# Altium PCB Sinalização_Official.PcbDoc
Units mm, origin at the board's own origin, x right, y up, seen from the top; angles counter-clockwise.
Board outline 65.15 x 100.2 mm, 2 copper layers (Top Layer, Bottom Layer), stack 1.671 mm thick; 27 components, 27 nets, 121 pads, 15 vias.
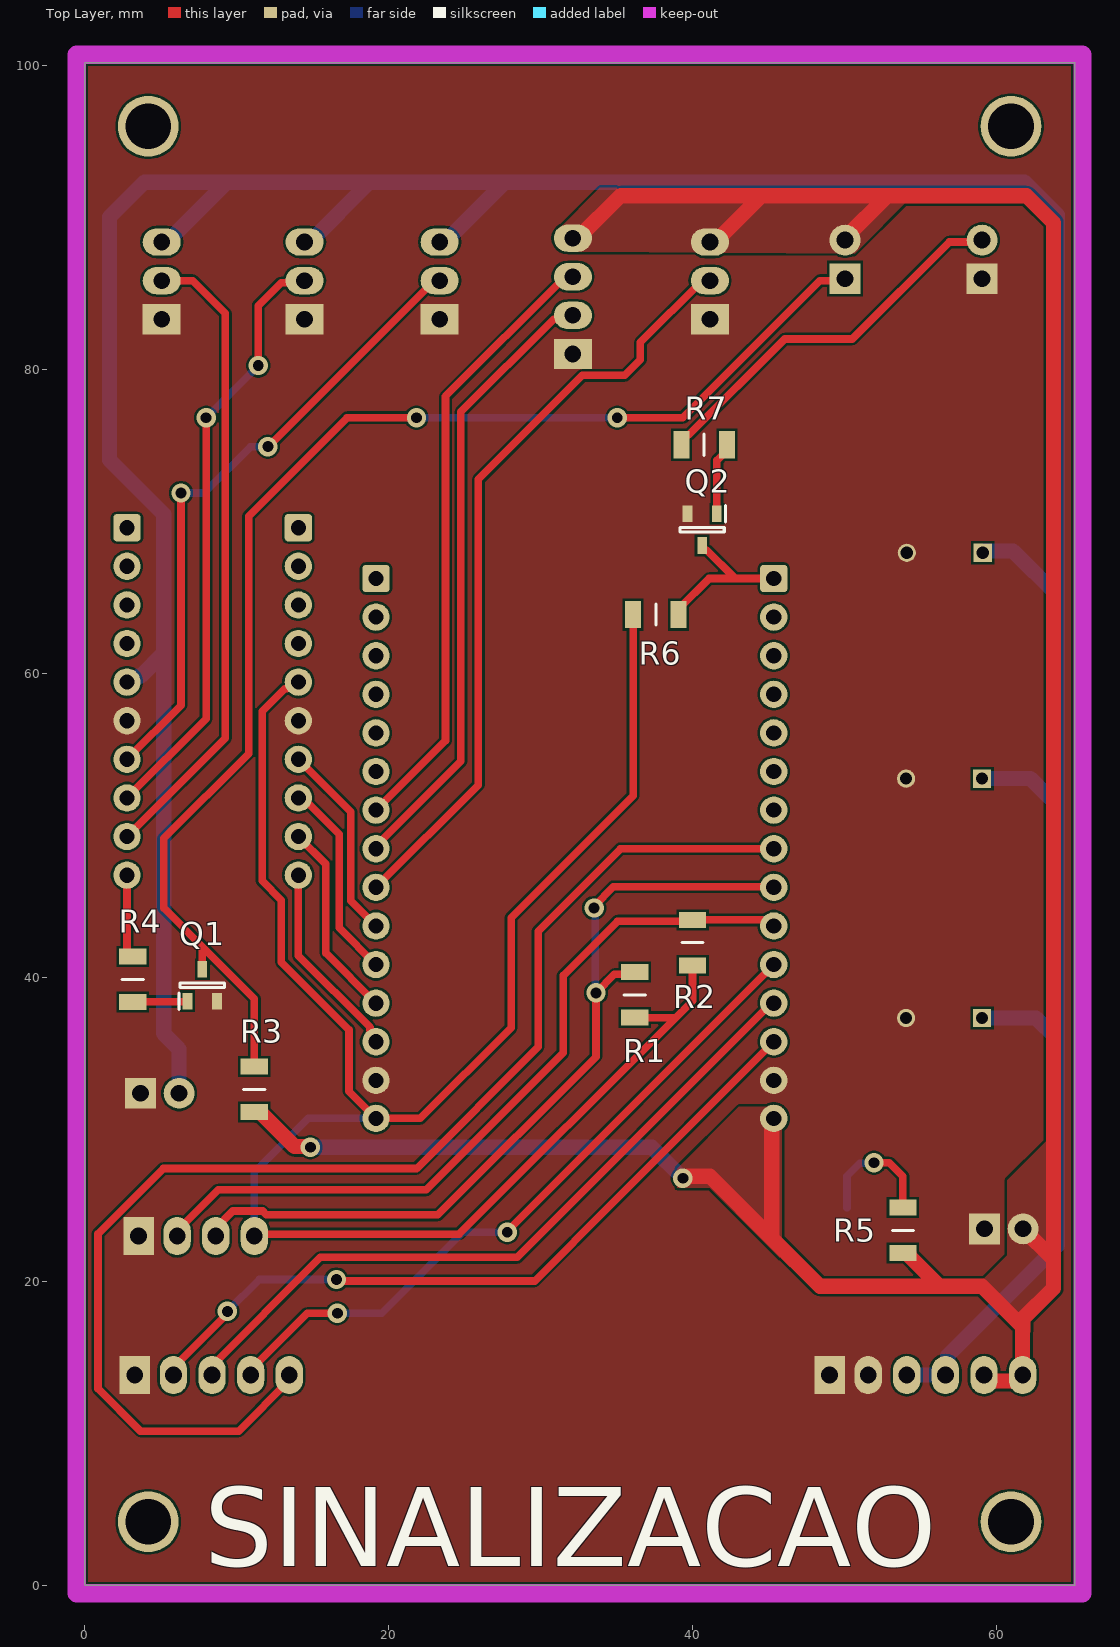
[diagram p0: Top Layer view]
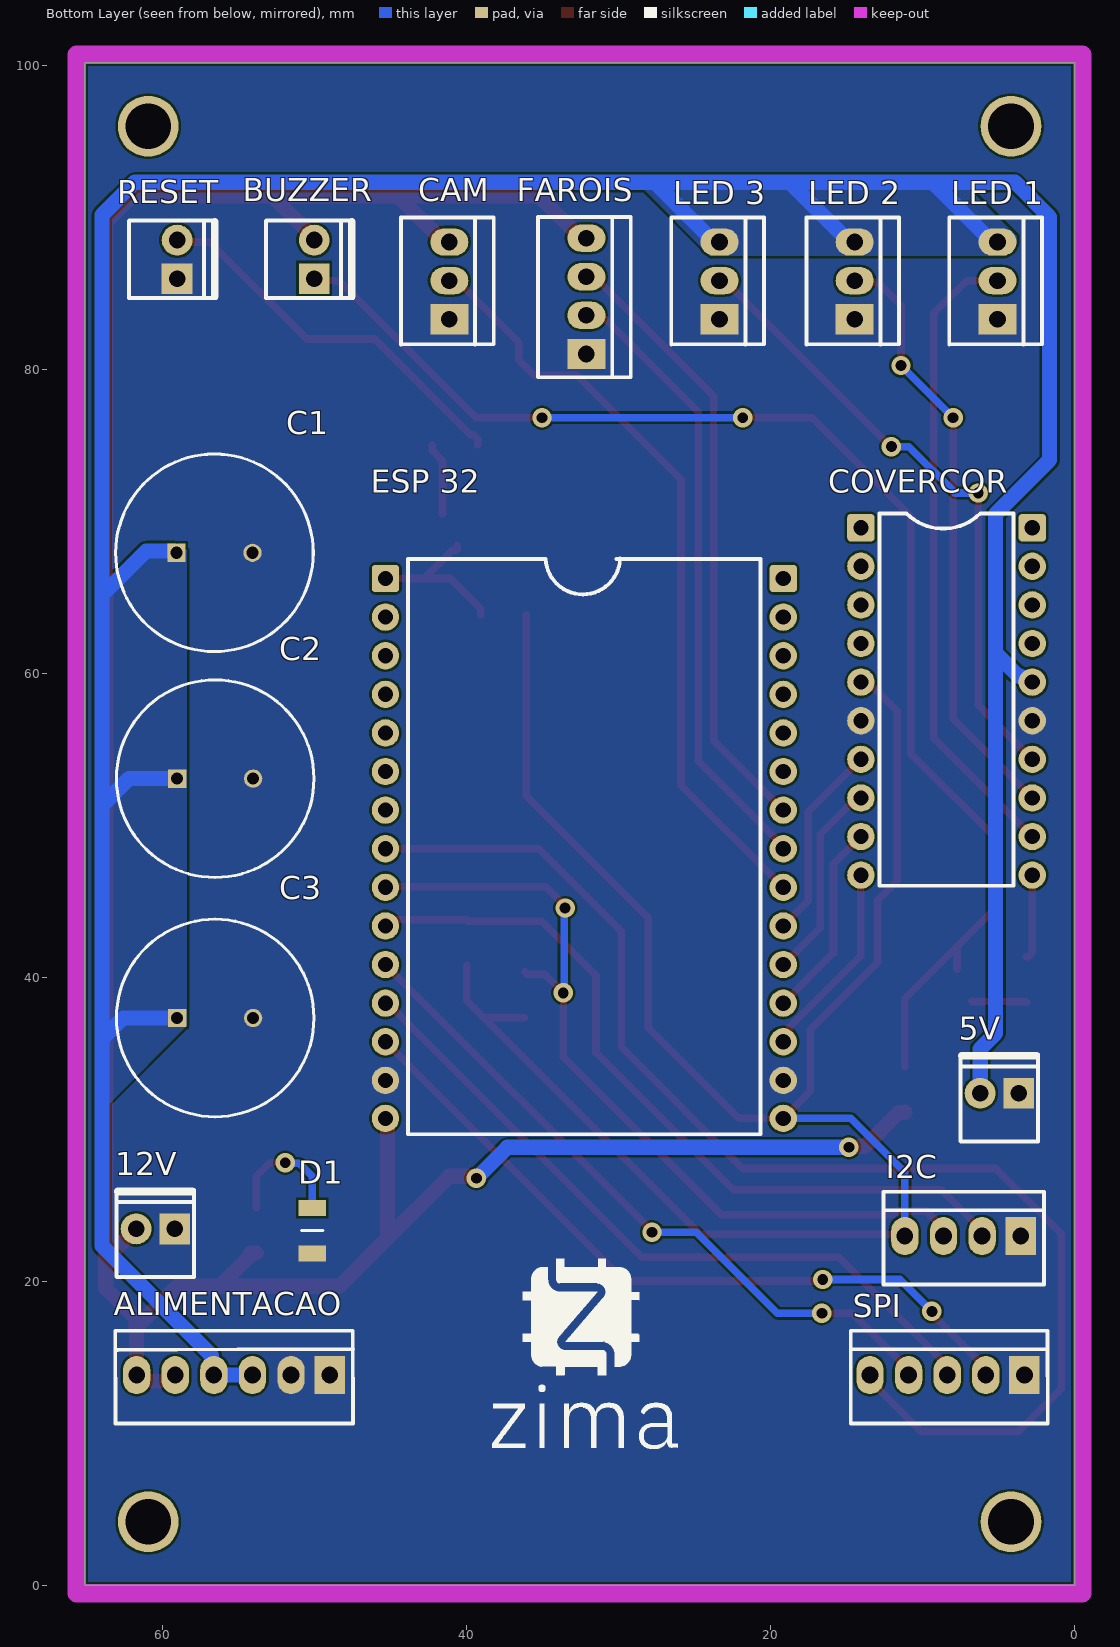
[diagram p1: Bottom Layer view, seen from below]

## Layer stack, top to bottom
Top Solder: solder mask 0.0102, Solder Resist, Dk 3.5
Top Layer: signal copper 0.0356
Dielectric 1: dielectric 1.6, FR-4, Dk 4.8
Bottom Layer: signal copper 0.0356
Bottom Solder: solder mask 0.0102, Solder Resist, Dk 3.5

## Board outline
0,0 65.151,0 65.151,100.203 0,100.203

## Design rules (kind name [scope] priority, off if disabled: settings)
Clearance [All] p1: gap=0.152 ignorepadtopadclearanceinfootprint=FALSE except(0: Arc-Hole Track-Hole SMDPad-Hole THPad-Hole Via-Hole Fill-Hole Poly-Hole Region-Hole Text-Hole)
ComponentClearance [All] p1: gap=0.1 collisioncheckmode=3 verticalgap=0.1 showdistances=FALSE
Height [All] p1: minheight=0 maxheight=30 prefheight=12.7
HoleSize [All] p1: absolutevalues=TRUE maxlimit=3.1 minlimit=0.025 maxpercent=80.000 minpercent=20.000
MinimumSolderMaskSliver [All] p1: minsoldermaskwidth=0.1
PolygonConnect [All] p1: connectstyle=Direct reliefconductorwidth=0.254 reliefentries=4 polygonreliefangle="90 Angle" airgapwidth=0.254
RoutingVias [All] p1: holewidth=0.4 width=0.8 viastyle="Through Hole" minholewidth=0.3 minwidth=0.6 maxholewidth=0.5 maxwidth=1
SilkToSilkClearance [All] p1: silktosilkclearance=0
SilkToSolderMaskClearance [IsPad] p1: minsilkscreentomaskgap=0 clearancetoexposedcopper=TRUE
SolderMaskExpansion [All] p1: expansion=0.08 istentingtop=FALSE
Width [All] p1: maxlimit=1 minlimit=0.3 preferedwidth=0.5
24 further rules are at their usual default settings.

## Classes and differential pairs
component class U_Sinalização_Leds_Buzzer_Conversor_Nível_Lógico: BUZZER C1 C2 C3 CAM COVERCOR FAROIS "LED 1" "LED 2" "LED 3" Q1 R3 R4
component class U_Sinalização_Comunicação: I2C R1 R2 SPI
component class U_Sinalização_Alimentação_&_Reset: 5V 12V ALIMENTACAO D1 Q2 R5 R6 R7 RESET
component class Sinalização_Official: "ESP 32"

## Components (designator, comment, footprint, x,y, rotation, side; value= is the part's Value field where it differs from the comment)
5V "KK_2.54_2vias" KK_2VIAS_180º 3.683,32.385 r0 bottom
12V "KK_2.54_2vias" KK_2VIAS_180º 59.214,23.463 r0 bottom
ALIMENTACAO "KK_2.54_6vias" KK_6vias_180° 49.022,13.843 r0 bottom
BUZZER "KK_2.54_2vias" KK_2VIAS_180º 50.038,85.979 r90 bottom
C1 "1000uF 50V" CAPPRD500W62D1300H2650 59.102,67.945 r180 bottom
C2 "1000uF 50V" CAPPRD500W62D1300H2650 59.055,53.086 r180 bottom
C3 "1000uF 50V" CAPPRD500W62D1300H2650 59.055,37.338 r180 bottom
CAM "KK_2.54_3vias" KK_3vias_180º 41.148,83.312 r90 bottom
COVERCOR "Conversor de nível logico" "Conversor de nível lógico" 14.044,69.596 r180 bottom
D1 "LED 3MM RED" "LED RED" 50.165,23.344 r270 bottom
"ESP 32" "microcontrolador" ESP32_Desvikit_v1 45.352,66.254 r180 bottom value="ESP32 Desvikit V1"
FAROIS "KK_2.54_4vias" KK_4vias_180° 32.131,81.026 r90 bottom
I2C "KK_2.54_4vias" KK_4vias_180° 3.556,22.987 r0 bottom
"LED 1" "KK_2.54_3vias" KK_3vias_180º 5.08,83.312 r90 bottom
"LED 2" "KK_2.54_3vias" KK_3vias_180º 14.478,83.312 r90 bottom
"LED 3" "KK_2.54_3vias" KK_3vias_180º 23.368,83.312 r90 bottom
Q1 "Trans BC817" SOT96P240X110-3N 7.747,39.497 r90 top
Q2 "Trans BC817" SOT96P240X110-3N 40.64,69.469 r270 top
R1 "4K7" RESC3216X60N 36.195,38.862 r270 top
R2 "4K7" RESC3216X60N 40.005,42.291 r270 top
R3 "1K" RESC3216X60N 11.176,32.639 r270 top
R4 "2K2" RESC3216X60N 3.175,39.878 r270 top
R5 "680R" RESC3216X60N 53.848,23.368 r90 top
R6 "Resistor 1206" RESC3216X60N 37.592,63.881 r180 top
R7 "2K2" RESC3216X60N 40.767,75.057 r180 top
RESET "KK_2.54_2vias" KK_2VIAS_180º 59.055,85.979 r90 bottom
SPI "KK_2.54_5vias" KK_5vias_180° 3.312,13.843 r0 bottom

## Footprints (in the part's own frame and the unit in brackets; to place one, negate y for a bottom-side part, rotate by r counter-clockwise, add the part's x,y. Pads: shape width x height; smd on the part's side, far side on the other; paste and mask are expansions set on the pad)
CAPPRD500W62D1300H2650 [mm]
  rect 1.2x1.2 hole 0.8: 1(0,0)
  round 1.2 hole 0.8: 2(5,0)
  silkscreen extent -4,-6.5 9,6.5, body extent -4.25,-6.75 9.25,6.75, height 26.5
"Conversor de nível lógico" [mm] "3V3 para 5V"
  rrect25% 1.8x1.8 hole 1: 1(-0.025,0) 11(11.25,0)
  round 1.8 hole 1: 2(-0.025,-2.54) 3(-0.025,-5.08) 4(-0.025,-7.62) 5(-0.025,-10.16) 6(-0.025,-12.7) 7(-0.025,-15.24) 8(-0.025,-17.78) 9(-0.025,-20.32) 10(-0.025,-22.86) 12(11.25,-2.54) 13(11.25,-5.08) 14(11.25,-7.62) 15(11.25,-10.16) 16(11.25,-12.7) 17(11.25,-15.24) 18(11.25,-17.78) 19(11.25,-20.32) 20(11.25,-22.86)
  silkscreen extent 1.2,-23.56 10.03,0.94, body extent -2.41,-24.56 13.59,1.52, height 10.56
ESP32_Desvikit_v1 [mm]
  rrect25% 1.8x1.8 hole 1: 1(0,0) 30(26.175,0)
  round 1.8 hole 1: 2(0,-2.54) 3(0,-5.08) 4(0,-7.62) 5(0,-10.16) 6(0,-12.7) 7(0,-15.24) 8(0,-17.78) 9(0,-20.32) 10(0,-22.86) 11(0,-25.4) 12(0,-27.94) 13(0,-30.48) 14(0,-33.02) 15(0,-35.52) 16(26.175,-35.52) 17(26.175,-33.02) 18(26.175,-30.48) 19(26.175,-27.94) 20(26.175,-25.4) 21(26.175,-22.86) 22(26.175,-20.32) 23(26.175,-17.78) 24(26.175,-15.24) 25(26.175,-12.7) 26(26.175,-10.16) 27(26.175,-7.62) 28(26.175,-5.08) 29(26.175,-2.54)
  silkscreen extent 1.47,-36.57 24.69,1.31, body extent -1.2,-46.03 27.4,4.9, height 15.1
KK_2VIAS_180º [mil] "Header KK 2pin"
  rect 80x80 hole 43.31: 1(0,0)
  round 80 hole 43.31: 2(100,0)
  silkscreen extent -50,-101 151,125, body extent -61,-108 165,128, height 465
KK_3vias_180º [mm] "Header KK 3 pin"
  rect 2x2.5 hole 1.1: 1(0,0)
  oval 1.8x2.5 hole 1.1: 2(2.54,0) 3(5.08,0)
  silkscreen extent -1.65,-2.92 6.69,3.17, body extent -1.6,-2.95 6.69,3.05, height 11.91
KK_4vias_180° [mm] "Header KK 4 pin"
  rect 2x2.5 hole 1.1: 1(0,0)
  oval 1.8x2.5 hole 1.1: 2(2.54,0) 3(5.08,0) 4(7.62,0)
  silkscreen extent -1.53,-2.92 9.02,3.17, body extent -1.4,-2.79 8.76,3.01, height 11.82
KK_5vias_180° [mm] "Header KK 5 pin"
  rect 2x2.5 hole 1.1: 1(0,0)
  oval 1.8x2.5 hole 1.1: 2(2.54,0) 3(5.08,0) 4(7.62,0) 5(10.16,0)
  silkscreen extent -1.53,-2.92 11.43,3.17, body extent -1.4,-2.79 11.3,3.01, height 11.82
KK_6vias_180° [mm]
  rect 2x2.5 hole 1.1: 1(0,0)
  oval 1.8x2.5 hole 1.1: 2(2.54,0) 3(5.08,0) 4(7.62,0) 5(10.16,0) 6(12.7,0)
  silkscreen extent -1.53,-2.92 14.11,3.17, body extent -1.4,-2.79 13.84,3.05, height 11.8
"LED RED" [mm]
  rect 1.05x1.8 smd: 1(-1.5,0) 2(1.5,0)
  silkscreen extent 0,-0.7 0,0.7, body extent -0.79,-0.43 0.81,0.37, height 0.75
RESC3216X60N [mm]
  rect 1.05x1.8 smd: 1(-1.5,0) 2(1.5,0)
  silkscreen extent 0,-0.7 0,0.7, body extent -1.58,-0.8 1.58,0.8, height 0.6
SOT96P240X110-3N [mm]
  rect 1.1x0.65 smd: 1(-1.05,0.96) 2(-1.05,-0.96) 3(1.05,0)
  silkscreen extent -1.6,-1.45 0.15,1.54, body extent -1.2,-1.45 1.2,1.45, height 1.1

## Part data
5V 12V BUZZER RESET: "Conector KK 2.54mm 2 vias", Descrição="Conector KK 3 vias com passo 2.54mm", Encapsulamento="PTH - 180º", Modelo="2 vias - 180º", Valor="KK 2 vias 180º"
ALIMENTACAO: "Conector KK 2.54mm 6 vias", Descrição="Conector KK 3 vias com passo 2.54mm", Encapsulamento="PTH - 180º", Modelo="3 vias - 180º", Valor="KK 6 vias 180º"
C1 C2 C3: "Capacitor Eletrolitico 1000uF 50V", Manufacturer_Name="Wurth Elektronik", Manufacturer_Part_Number=860010678024, Mouser Part Number=710-860010678024, Datasheet Link=https://www.mouser.com/datasheet/2/445/860010678024-1093799.pdf, Height=26.5mm, Mouser Price/Stock=https://www.mouser.com/Search/Refine.aspx?Keyword=710-860010678024
CAM "LED 1" "LED 2" "LED 3": "Conector KK 2.54mm 3 vias", Descrição="Conector KK 3 vias com passo 2.54mm", Encapsulamento="PTH - 180º", Modelo="3 vias - 180º", Valor="KK 3 vias 180º"
D1: Current If Luminous Intensity=2, Forward Current If=20, Forward Voltage VF Max=2.5, LED Colour=Red, Manufacturer=Paralight, Manufacturer Part Number=IMP585, Operating Temperature Max=85, Operating Temperature Min=-40, Operating Temperature Range="-40°C to +85", Peak Forward Current=7, Supplier Part Number 1="Led 3mm Vermelho Difuso L-314HD - Paralight", Voltage Vf Typ="2.2V<!--FANDB--><div class=\"features-and-benefits-container\"><div class=\"features-and-benefits-description\"><span class=\"features-benefits-value\">The L-934LID from Kingbright is a through hole round shape high efficiency red colour LED. The device is made of gallium arsenide phosphide on gallium phosphide orange light emitting diode. This LED is widely used because of low power consumption, long life and solid state reliability.</span></div><div class=\"features-and-benefits-list\"><ul class=\"features-and-benefits-list-list\"><li class=\"features-and-benefits-list-item\">Standard bulb size of T-1 (3mm)</li><li class=\"features-and-benefits-list-item\">Reliable and rugged</li><li class=\"features-and-benefits-list-item\">Viewing angle is 60°</li><li class=\"features-and-benefits-list-item\">Luminous intensity of 3mcd at 2mA</li><li class=\"features-and-benefits-list-item\">Forward voltage is 2.0V</li><li class=\"features-and-benefits-list-item\">Forward current (If) is 20mA</li><li class=\"features-and-benefits-list-item\">Dominant wavelength is 625nm at IF=20mA</li><li class=\"features-and-benefits-list-item\">Peak wavelength is 627nm at IF=20", Bulb Size=3mm, ComponentLink1Description=http://loja.multcomercial.com.br/led-3mm-vermelho-difuso-l-314hd-paralight.html, ComponentLink1URL=http://loja.multcomercial.com.br/led-3mm-vermelho-difuso-l-314hd-paralight.html, Dominant Wavelength=625, External Diameter=2.9, External Length / Height=4.6, Forward Current If Max=20, Forward Voltage=2, Lead Cross-section Depth=0.5, Lead Cross-section Width=0.5, Lead Spacing=2.54, LED / Lamp Size="3mm / T-1", LED Mounting="Through Hole", LED Type=Standard, Lens Shape=Round, Luminous Intensity=3, Luminous Intensity @ If Min=0.7, Luminous Intensity Typ=3, Mounting Type="PCB Through Hole", MSL=-, No. of Pins=2, Packaging=Each, Peak Wavelength=625, PIV Max=5, Pricing 1="1=0.15 (BRL)", RoHS=YES, Stock 1=35260, Supplier 1="Mult Comercial", SVHC="No SVHC (15-Jun-2015)", Viewing Angle=60°, Wavelength Typ=625
"ESP 32": library part "ESP32 Desvikit v1", "microcontrolador com moculo bluethoth e wifi"
FAROIS I2C: "Conector KK 2.54mm 4 vias", Descrição="Conector KK 3 vias com passo 2.54mm", Encapsulamento="PTH - 180º", Modelo="3 vias - 180º", Valor="KK 4 vias 180º"
Q1 Q2: "Transistor BJT NPN BC817-25-7-F", Arrow Part Number=BC817-25-7-F, Manufacturer_Name="Diodes Inc.", Mouser Part Number=621-BC817-25-7-F, Arrow Price/Stock=https://www.arrow.com/en/products/bc817-25-7-f/diodes-incorporated, Datasheet Link=https://www.diodes.com/assets/Datasheets/ds11107.pdf, Height=1.1mm, Manufacturer_Part_Number=BC817-25-7-F, Mouser Price/Stock=https://www.mouser.co.uk/ProductDetail/Diodes-Incorporated/BC817-25-7-F?qs=rGAXPo9uwV0jK0EyLZnqOw%3D%3D
R1 R2 R3 R4 R5 R7: library part "Resistor 1206", "Resistor", Arrow Part Number=CRCW12064K70FKEA, Manufacturer_Name=Vishay, Mouser Part Number=71-CRCW1206-4.7K-E3, Arrow Price/Stock=https://www.arrow.com/en/products/crcw12064k70fkea/vishay, Datasheet Link=http://docs-emea.rs-online.com/webdocs/13ec/0900766b813ecc08.pdf, Height=0.6mm, Manufacturer_Part_Number=CRCW12064K70FKEA, Mouser Price/Stock=https://www.mouser.co.uk/ProductDetail/Vishay-Dale/CRCW12064K70FKEA?qs=1vm4qhDHCvlKJmatsKzyFQ%3D%3D
R6: "Resistor", Arrow Part Number=CRCW12064K70FKEA, Manufacturer_Name=Vishay, Mouser Part Number=71-CRCW1206-4.7K-E3, Arrow Price/Stock=https://www.arrow.com/en/products/crcw12064k70fkea/vishay, Datasheet Link=http://docs-emea.rs-online.com/webdocs/13ec/0900766b813ecc08.pdf, Height=0.6mm, Manufacturer_Part_Number=CRCW12064K70FKEA, Mouser Price/Stock=https://www.mouser.co.uk/ProductDetail/Vishay-Dale/CRCW12064K70FKEA?qs=1vm4qhDHCvlKJmatsKzyFQ%3D%3D
SPI: "Conector KK 2.54mm 5 vias", Descrição="Conector KK 3 vias com passo 2.54mm", Encapsulamento="PTH - 180º", Modelo="3 vias - 180º", Valor="KK 5 vias 180º"

## Free pads (board coordinates)
  round 4 hole 3: 1(4.191,96.012) 2(60.96,96.012) 3(4.191,4.191) 4(60.96,4.191)

## Via types
v1: diameter 1.27, hole 0.711, Top Layer to Bottom Layer, 15 vias

## Nets (pads, with @x,y where several pads share a name; then routed paths per layer and width w, separated by ;. In a path a pad name is that pad's centre, name@x,y a point inside that pad or via, vN(x,y) a via of type N, cw(c..) or ccw(c..) an arc to the next point about the centre after c; other vN are vias at no path point)
+3V3: "ESP 32.16" COVERCOR.5 I2C.4 R1.2 R2.2 R6.2 | length 128.9
  Top Layer w0.5: I2C.4 11.303,23.114 24.638,23.114 38.886,37.362 ; COVERCOR.5 13.717,59.436 13.29,59.009 13.162,59.009 11.684,57.531 11.684,46.355 12.954,45.085 12.954,41.021 17.399,36.576 17.399,32.512 19.177,30.734 22.098,30.734 28.067,36.703 28.067,43.942 36.092,51.967 R6.2 ; R1.2 38.886,37.362 ; R2.2 40.005,38.481 38.886,37.362
  Bottom Layer w0.5: I2C.4 11.176,27.178 14.732,30.734 19.177,30.734
+5: 5V.2 "LED 1.3" "LED 2.3" "LED 3.3" ALIMENTACAO.3 ALIMENTACAO.4 C1.1 C2.1 C3.1 COVERCOR.15 | length 243.8
  Bottom Layer w1: COVERCOR.15 3.146,59.436 3.559,59.849 3.715,59.849 5.207,61.341 ; 5.08,88.392 5.43,88.392 9.367,92.329 ; 5V.2 6.223,35.306 5.207,36.322 5.207,61.341 ; 14.478,88.392 14.828,88.392 18.765,92.329 ; 23.368,88.392 23.718,88.392 27.655,92.329 ; ALIMENTACAO.3 ALIMENTACAO.4 56.795,13.996 56.795,15.139 64.008,22.352 64.008,35.941 ; C2.1 62.23,53.086 64.008,51.308 ; C1.1 59.229,68.072 61.087,68.072 64.008,65.151 ; C3.1@59.309,37.338 62.611,37.338 64.008,35.941 ; 5.207,61.341 5.207,70.485 1.651,74.041 1.651,90.043 3.937,92.329 9.367,92.329 ; 9.367,92.329 18.765,92.329 ; 18.765,92.329 27.655,92.329 ; 27.655,92.329 61.849,92.329 64.008,90.17 64.008,65.151 ; 64.008,35.941 64.008,51.308 ; 64.008,51.308 64.008,65.151
+12: 12V.2 "ESP 32.15" ALIMENTACAO.5 ALIMENTACAO.6 BUZZER.2 CAM.3 FAROIS.4 R3.2 R5.1 | length 192.1
  Top Layer w1: R3.2 11.201,31.114 11.576,31.114 13.809,28.881 14.807,28.881 v1(14.859,28.829) ; FAROIS.4 32.481,88.646 35.275,91.44 44.546,91.44 ; v1@39.318,26.849 39.613,26.849 39.688,26.924 41.148,26.924 45.212,22.86 ; CAM.3 41.498,88.392 44.546,91.44 ; 45.352,30.734 45.212,30.594 45.212,22.86 ; BUZZER.2 50.038,88.646 52.832,91.44 ; R5.1 54.223,21.868 54.248,21.843 54.248,21.698 56.261,19.685 ; ALIMENTACAO.5 59.577,13.448 61.327,13.448 ALIMENTACAO.6 61.722,16.764 ; 61.468,17.272 59.055,19.685 56.261,19.685 ; 61.754,16.764 61.754,17.558 63.754,19.558 63.754,21.463 ; 12V.2 63.754,21.463 ; 44.546,91.44 52.832,91.44 ; 45.212,22.86 48.387,19.685 56.261,19.685 ; 52.832,91.44 61.976,91.44 63.754,89.662 63.754,21.463
  Bottom Layer w1: v1(14.859,28.829) 37.338,28.829 v1(39.37,26.797)
Buzzer_3V3: "ESP 32.18" COVERCOR.10 | length 13.1
  Top Layer w0.5: COVERCOR.10 14.069,41.43 18.784,36.715 18.784,36.519 19.177,36.126 19.177,35.774
Buzzer_5V: COVERCOR.20 R4.1 | length 5.6
  Top Layer w0.5: COVERCOR.20 2.794,41.653 3.069,41.378 R4.1
Camêra_3V3: "ESP 32.22" CAM.2 | length 51
  Top Layer w0.5: 19.177,45.934 25.908,52.665 25.908,72.771 32.761,79.624 35.555,79.624 36.576,80.645 36.576,81.788 40.64,85.852 CAM.2
CLK_IN: "ESP 32.11" SPI.4 | length 45.7
  Top Layer w0.5: SPI.4 10.932,14.193 14.646,17.907 v1(16.637,17.907) ; v1@27.866,23.368 45.352,40.854
  Bottom Layer w0.5: v1(16.637,17.907) 19.558,17.907 24.892,23.241 v1(27.813,23.241)
"Dado1 Led_3V3": "ESP 32.19" COVERCOR.9 | length 13.1
  Top Layer w0.5: COVERCOR.9 15.875,47.47 15.875,41.616 19.177,38.314
"Dado1 Led_5V": "LED 1.2" COVERCOR.19 | length 42.2
  Top Layer w0.5: COVERCOR.19 9.271,55.753 9.271,83.693 7.112,85.852 5.08,85.852
"Dado2 Led_3V3": "ESP 32.20" COVERCOR.8 | length 13.2
  Top Layer w0.5: COVERCOR.8 14.351,51.816 16.747,49.42 16.747,43.284 19.177,40.854
"Dado2 Led_5V": "LED 2.2" COVERCOR.18 | length 39.7
  Top Layer w0.5: COVERCOR.18 8.001,57.023 v1(8.001,76.835) ; v1(11.43,80.264) 11.43,84.201 12.938,85.709 14.335,85.709 14.478,85.852
  Bottom Layer w0.5: v1(8.001,76.835) v1(11.43,80.264)
"Dado3 Led_3V3": "ESP 32.21" COVERCOR.7 | length 13.1
  Top Layer w0.5: COVERCOR.7 17.526,50.899 17.526,45.045 19.177,43.394
"Dado3 Led_5V": "LED 3.2" COVERCOR.17 | length 41.8
  Top Layer w0.5: COVERCOR.17 6.35,57.912 v1(6.35,71.882) ; v1(12.065,74.93) 12.096,74.93 23.018,85.852 23.368,85.852
  Bottom Layer w0.5: v1(6.35,71.882) 7.874,71.882 10.922,74.93 v1(12.065,74.93)
EN: "ESP 32.1" Q2.3 R6.1 | length 10.6
  Top Layer w0.5: R6.1 39.092,64.256 41.09,66.254 42.765,66.254 45.352,66.254 ; Q2.3 40.64,68.194 40.715,68.119 40.94,68.119 42.765,66.294
GND: 5V.1 12V.1 "ESP 32.14" "ESP 32.17" "LED 1.1" "LED 2.1" "LED 3.1" ALIMENTACAO.1 ALIMENTACAO.2 C1.2 C2.2 C3.2 CAM.1 COVERCOR.6 COVERCOR.16 D1.2 FAROIS.1 I2C.1 Q1.2 Q2.2 RESET.1 SPI.1
MISO_IN: "ESP 32.12" SPI.3 | length 47.6
  Top Layer w0.5: SPI.3@8.128,13.843 8.128,14.193 15.525,21.59 28.475,21.59 45.199,38.314 45.352,38.314
MOSI_IN: "ESP 32.13" SPI.2 | length 49
  Top Layer w0.5: SPI.2 5.852,14.34 9.398,17.887 v1(9.398,18.034) ; v1(16.573,20.13) 16.671,20.032 29.61,20.032 34.798,25.22 45.352,35.774
  Bottom Layer w0.5: v1(9.398,18.034) 11.493,20.13 v1(16.573,20.13)
NetBUZZER_1: BUZZER.1 Q1.3 R3.1 | length 89.7
  Top Layer w0.5: R3.1 11.176,38.608 7.747,42.037 ; v1(21.844,76.835) 17.272,76.835 10.795,70.358 10.795,54.737 5.207,49.149 5.207,44.577 7.747,42.037 ; v1(35.052,76.835) 39.37,76.835 48.387,85.852 49.911,85.852 BUZZER.1 ; 7.747,42.037 Q1.3 7.747,40.772 7.747,42.037
  Bottom Layer w0.5: v1(21.844,76.835) v1(35.052,76.835)
NetD1_1: D1.1 R5.2 | length 8.6
  Top Layer w0.5: v1(51.943,27.813) 52.959,27.813 53.848,26.924 R5.2
  Bottom Layer w0.5: D1.1 50.165,26.924 51.019,27.778 51.908,27.778 v1(51.943,27.813)
NetQ1_1: Q1.1 R4.2 | length 3.6
  Top Layer w0.5: R4.2 3.21,38.413 6.753,38.413 Q1.1
NetQ2_1: Q2.1 R7.1 | length 4.8
  Top Layer w0.5: Q2.1 41.6,74.015 42.267,74.682 R7.1
NetR7_2: R7.2 RESET.2 | length 25.6
  Top Layer w0.5: R7.2 39.267,75.432 39.542,75.707 39.766,75.707 46.071,82.012 50.516,82.012 56.896,88.392 58.928,88.392 RESET.2
S_d_3V3: "ESP 32.24" FAROIS.3 | length 40.8
  Top Layer w0.5: 19.177,51.014 23.749,55.586 23.749,78.232 31.623,86.106 FAROIS.3
S_e_3V3: "ESP 32.23" FAROIS.2 | length 41.1
  Top Layer w0.5: 19.177,48.474 19.177,48.641 24.765,54.229 24.765,77.216 30.866,83.317 31.882,83.317 FAROIS.2
SCL_IN: "ESP 32.10" I2C.2 R2.1 | length 51.2
  Top Layer w0.5: I2C.2 6.096,23.337 8.794,26.035 22.479,26.035 31.496,35.052 31.496,40.132 35.07,43.706 39.92,43.706 R2.1 44.603,43.791 45,43.394 45.352,43.394
SDA_IN: "ESP 32.9" I2C.3 R1.1 | length 55.9
  Top Layer w0.5: I2C.3 8.636,23.512 9.763,24.639 11.715,24.639 11.97,24.384 23.241,24.384 33.655,34.798 v1(33.655,38.989) 34.869,40.203 36.036,40.203 R1.1 ; v1(33.528,44.577) 33.528,44.704 34.798,45.974 45.312,45.974 45.352,45.934
  Bottom Layer w0.5: v1(33.528,44.577) 33.591,44.514 33.591,39.052 v1(33.655,38.989)
SS: "ESP 32.8" SPI.5 | length 85.1
  Top Layer w0.5: SPI.5 13.472,13.493 10.139,10.16 3.683,10.16 0.889,12.954 0.889,23.139 5.182,27.432 21.844,27.432 29.845,35.433 29.845,43.053 35.266,48.474 45.352,48.474
pads on no net: "ESP 32.2" "ESP 32.3" "ESP 32.4" "ESP 32.5" "ESP 32.6" "ESP 32.7" "ESP 32.25" "ESP 32.26" "ESP 32.27" "ESP 32.28" "ESP 32.29" "ESP 32.30" COVERCOR.1 COVERCOR.2 COVERCOR.3 COVERCOR.4 COVERCOR.11 COVERCOR.12 COVERCOR.13 COVERCOR.14

## Polygon pours and split planes (outlines as drawn)
GND on Top Layer "NONET_L-01_P-001" (solid, pour order 10): 0,0 65.151,0 65.151,100.203 0.254,100.203 0,100.203
+12 on Top Layer "NONET_L-01_P-001" (solid, pour order 4): 30.988,89.027 33.909,91.948 35.179,91.948 32.258,89.027
+12 on Top Layer "NONET_L-01_P-001" (solid, pour order 2): 41.153,26.162 45.86,21.449 45.86,31.496 43.053,31.496 38.989,27.432 38.989,26.162
+12 on Top Layer "NONET_L-01_P-001" (solid, pour order 3): 31.707,87.757 32.639,87.757 50.673,87.63 54.483,91.44 34.851,91.44
+12 on Top Layer "NONET_L-01_P-001" (solid, pour order 1): 60.706,21.535 60.706,26.67 63.754,29.718 63.754,22.86
+12 on Top Layer "NONET_L-01_P-001" (solid, pour order 0): 61.754,22.765 63.373,24.384 63.754,24.003 63.754,19.177 61.754,17.177 58.991,19.939 58.928,19.939
GND on Bottom Layer "NONET_L-01_P-001" (solid, pour order 9): 0,0 65.151,0 65.151,100.203 65.024,100.203 0,100.203
+5 on Bottom Layer "NONET_L-01_P-001" (solid, pour order 8): 59.69,68.453 61.087,68.453 64.008,65.532 64.008,64.192 63.062,64.192 58.66,68.103
+5 on Bottom Layer "NONET_L-01_P-001" (solid, pour order 7): 58.42,36.818 58.42,68.278 64.008,64.192 63.684,31.553
+5 on Bottom Layer "NONET_L-01_P-001" (solid, pour order 6): 5.715,87.503 4.572,87.503 3.81,88.265 3.81,88.773 7.366,92.329 10.922,92.329
+5 on Bottom Layer "NONET_L-01_P-001" (solid, pour order 5): 24.13,87.63 24.003,87.503 4.572,87.503 4.572,88.265 8.255,91.948 28.448,91.948

## Keep-outs
Keep-Out Layer:
  lines w1.2: -0.508,-0.508 -0.508,100.711 65.659,100.711 65.659,-0.508 -0.508,-0.508

## Silkscreen, mask and mechanical layers (free items; w line width, h text height)
Top Overlay:
  text "SINALIZACAO" at 7.874,1.27 h5.2
Bottom Overlay:
  drawing of 7 lines, arcs and shapes, not listed